# Altium PCB L298N电机驱动.PcbDoc
Units mm, origin at the board's own origin, x right, y up, seen from the top; angles counter-clockwise.
Board outline 152.4 x 101.6 mm, 2 copper layers (Top Layer, Bottom Layer); 26 components, 30 nets, 94 pads, 2 vias.
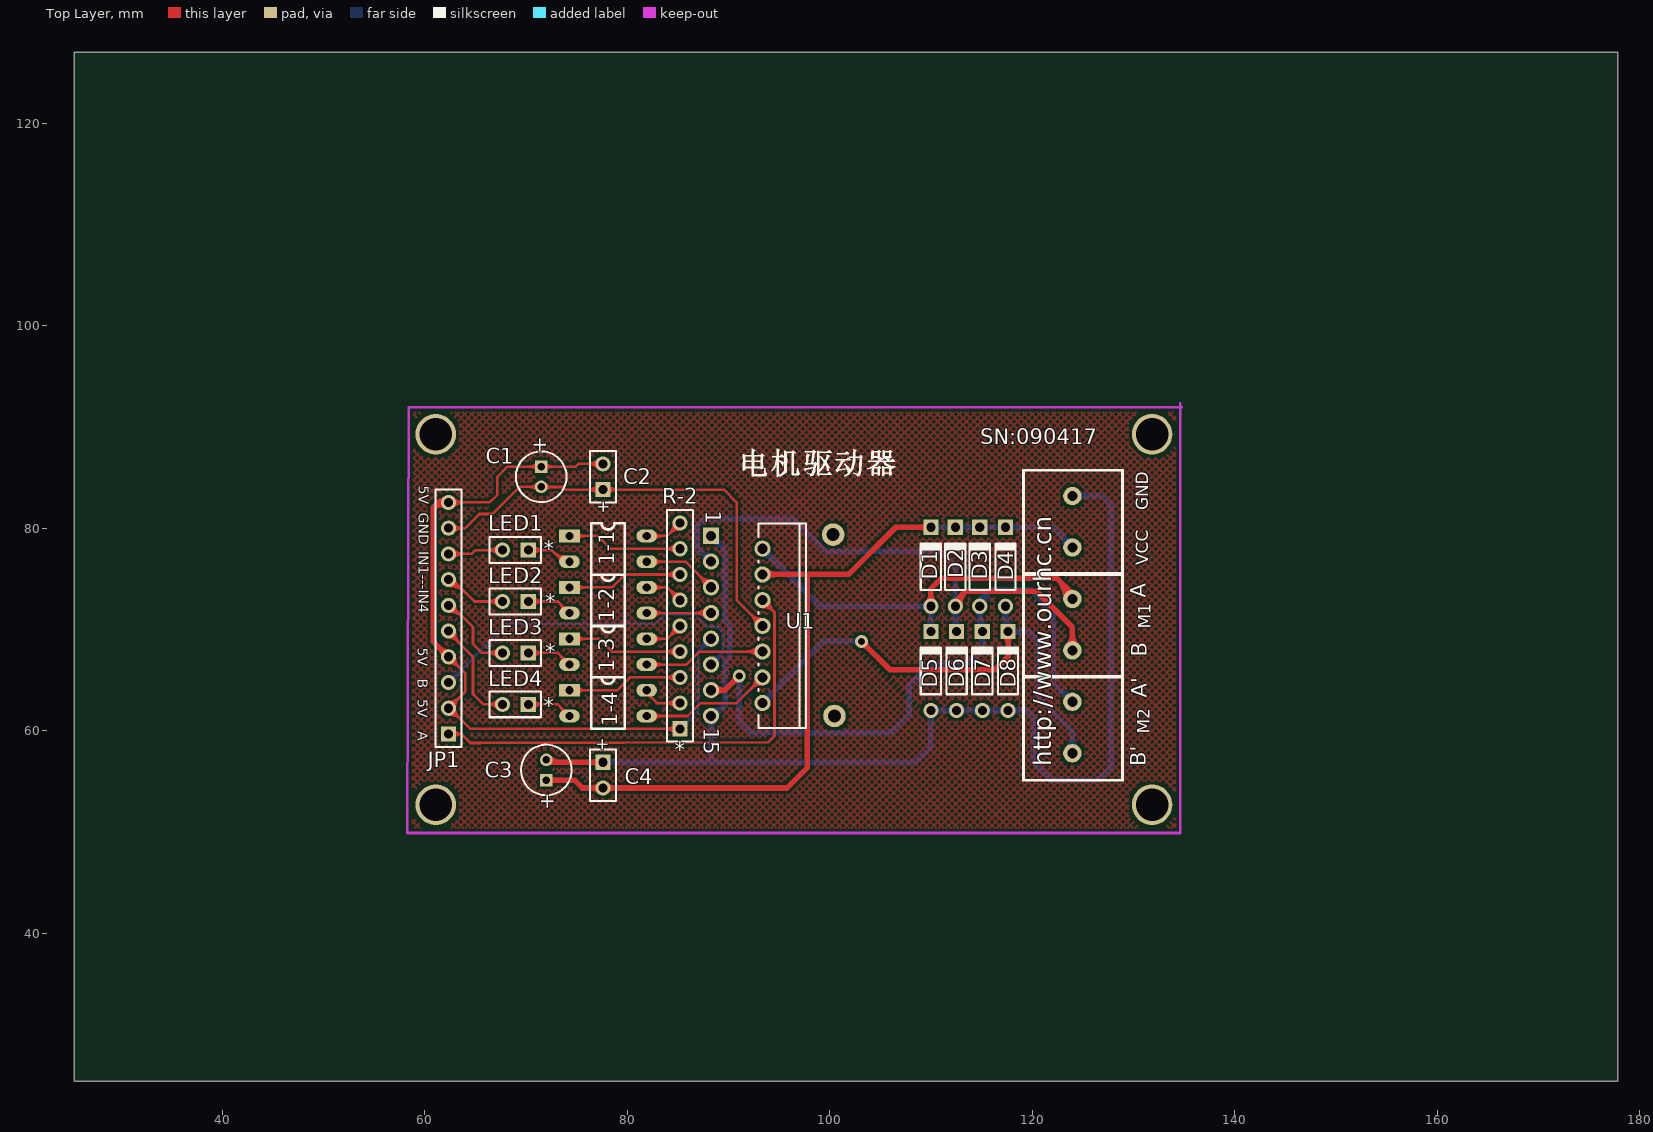
[diagram p0: Top Layer view]
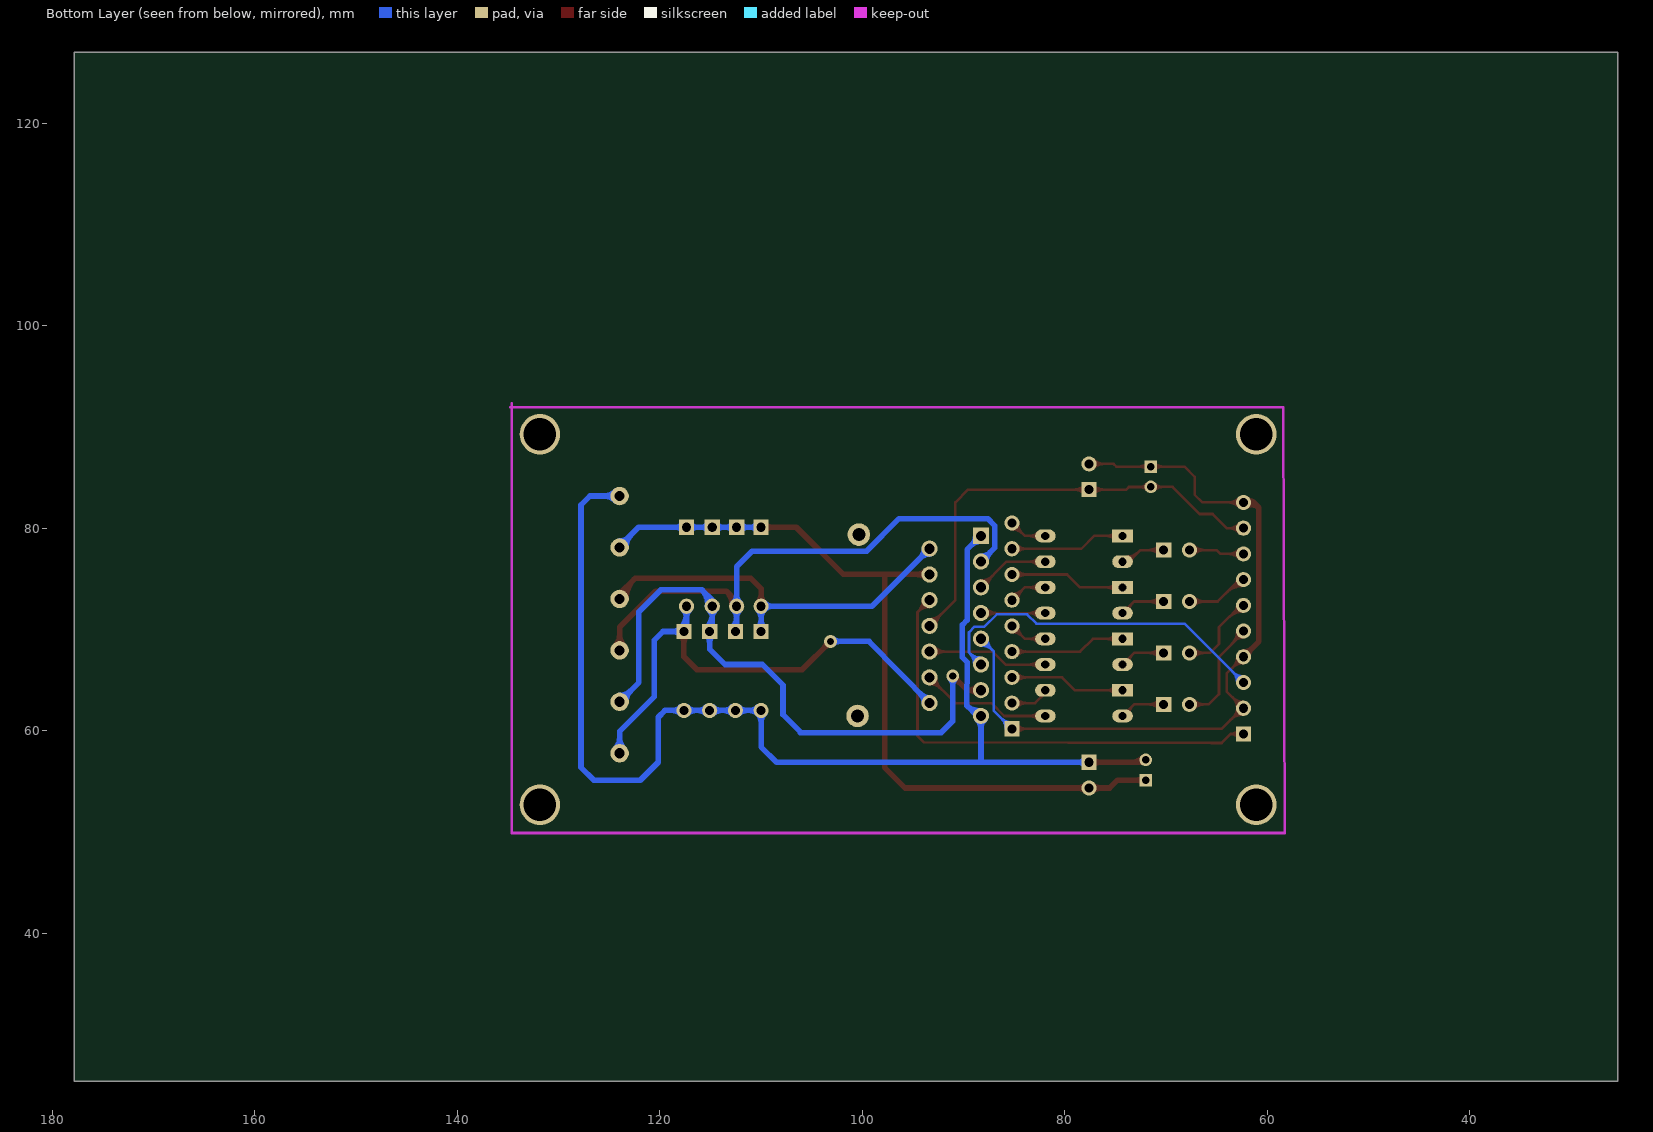
[diagram p1: Bottom Layer view, seen from below]

## Layer stack, top to bottom
Top Layer: signal copper 0.0356
Dielectric: dielectric 0.32, FR-4, Dk 4.8
Bottom Layer: signal copper 0.0356

## Board outline
25.4,25.4 177.8,25.4 177.8,127 25.4,127

## Design rules (kind name [scope] priority, off if disabled: settings)
Clearance [All] p1: gap=0.254
ComponentClearance [All] p1: gap=0.254 collisioncheckmode=3 verticalgap=0.254
PolygonConnect [All] p1: connectstyle=Relief reliefconductorwidth=0.254 reliefentries=4 polygonreliefangle="90 Angle"
RoutingVias [All] p1: holewidth=0.711 width=1.27 viastyle="Through Hole" minholewidth=0.711 minwidth=1.27 maxholewidth=0.711 maxwidth=1.27
SolderMaskExpansion [All] p1: expansion=0.102
TestPointUsage [All] p1: valid=0 allowmultiple=FALSE
Testpoint [All] p1: side=15 testpointundercomponent=TRUE minsize=1.016 maxsize=2.54 preferedsize=1.524 minholesize=0 maxholesize=1.016 preferedholesize=0.813 testpointgrid=0.025 style=1023 order=0-112345678
Width Width_2 [(InNet('NetD2_1') OR InNet('NetD3_1') OR InNet('+5V') OR InNet('+5V'))] p1: maxlimit=0.554 minlimit=0.554 preferedwidth=0.554
Width Width_1 [(InNet('+12V') OR InNet('GND-12') OR InNet('NetD4_1') OR InNet('NetD1_1'))] p2: maxlimit=0.554 minlimit=0.554 preferedwidth=0.554
Width [All] p3: maxlimit=0.254 minlimit=0.254 preferedwidth=0.254
17 further rules are at their usual default settings.

## Components (designator, comment, footprint, x,y, rotation, side; value= is the part's Value field where it differs from the comment)
1-1 "" DIP4 74.295,79.248 r0 top (schematic designator TLP521-1)
1-2 "" DIP4 74.295,74.168 r0 top (schematic designator TLP521-2)
1-3 "" DIP4 74.295,69.088 r0 top (schematic designator TLP521-3)
1-4 "" DIP4 74.295,64.008 r0 top (schematic designator TLP521-4)
C1 "" CAPPR2-5x6.8 71.501,85.09 r270 top
C2 "104" BAT-2 77.597,85.09 r90 top
C3 "" CAPPR2-5x6.8 72.009,56.134 r90 top
C4 "104" BAT-2 77.597,55.626 r270 top
D1 "1N4007" DIO7.8-4.6x2 109.982,76.2 r90 top
D2 "1N4007" DIO7.8-4.6x2 112.395,76.2 r90 top
D3 "1N4007" DIO7.8-4.6x2 114.808,76.2 r90 top
D4 "1N4007" DIO7.8-4.6x2 117.348,76.2 r90 top
D5 "1N4007" DIO7.8-4.6x2 109.982,65.913 r90 top
D6 "1N4007" DIO7.8-4.6x2 112.522,65.913 r90 top
D7 "1N4007" DIO7.8-4.6x2 115.062,65.913 r90 top
D8 "1N4007" DIO7.8-4.6x2 117.602,65.913 r90 top
JP1 "Header 10" HDR1X10 62.357,59.69 r90 top
LED1 "" HDR1X2 70.231,77.851 r180 top
LED2 "" HDR1X2 70.231,72.771 r180 top
LED3 "" HDR1X2 70.231,67.691 r180 top
LED4 "" HDR1X2 70.231,62.611 r180 top
M1 "" JK128 125.095,72.517 r0 top
M2 "" JK128 125.095,62.357 r0 top
R-2 "" HDR1X9 85.217,80.518 r270 top
U1 "L298N" DFM-T15/X1.6V 90.805,70.358 r270 top
VCC "" JK128 125.095,82.677 r0 top (schematic designator "Power 12V")

## Footprints (in the part's own frame and the unit in brackets; to place one, negate y for a bottom-side part, rotate by r counter-clockwise, add the part's x,y. Pads: shape width x height; smd on the part's side, far side on the other; paste and mask are expansions set on the pad)
BAT-2 [mm] "Multicell Battery; 2 Leads"
  rect 1.5x1.5 hole 0.9: 1(-1.27,0)
  round 1.5 hole 0.9: 2(1.27,0)
  silkscreen extent -2.54,-1.27 2.54,1.27
CAPPR2-5x6.8 [mm]
  rect 1.25x1.25 hole 0.75: 1(-1,0)
  round 1.25 hole 0.75: 2(1,0)
  silkscreen extent -2.5,-2.5 2.5,2.5
DFM-T15/X1.6V [mm]
  rect 1.6x1.6 hole 1: 1(-8.895,-2.531)
  round 1.6 hole 1: 2(-7.625,2.549) 3(-6.355,-2.531) 4(-5.085,2.549) 5(-3.815,-2.531) 6(-2.545,2.549) 7(-1.275,-2.531) 8(-0.005,2.549) 9(1.265,-2.531) 10(2.535,2.549) 11(3.805,-2.531) 12(5.075,2.549) 13(6.345,-2.531) 14(7.615,2.549) 15(8.885,-2.531)
  silkscreen extent -10.1,2.15 10.1,6.85
DIO7.8-4.6x2 [mm] "Diode, Axial; Body 4.6 x 1.9 mm (LxDia. max), Lead Dia. 0.53 mm (max)"
  round 1.5 hole 0.9: 1(-3.9,0)
  rect 1.5x1.5 hole 0.9: 2(3.9,0)
  silkscreen extent -2.3,-1 2.4,1
DIP4 [mil]
  rect 80x50 hole 32: 1(0.03,-0.24)
  oval 80x50 hole 32: 2(0.03,-100.24) 3(300.03,-100.24) 4(300.03,-0.24)
  silkscreen extent 85,-150 215,50
HDR1X2 [mm]
  rect 1.5x1.5 hole 0.9: 1(0,0)
  round 1.5 hole 0.9: 2(2.54,0)
  silkscreen extent -1.27,-1.27 3.81,1.27
HDR1X9 [mm] "Connector; Header; 9 Position"
  round 1.5 hole 0.9: 1(0,0) 2(2.54,0) 3(5.08,0) 4(7.62,0) 5(10.16,0) 6(12.7,0) 7(15.24,0) 8(17.78,0)
  rect 1.5x1.5 hole 0.9: 9(20.32,0)
  silkscreen extent -1.27,-1.27 21.59,1.27
HDR1X10 [mm] "Connector; Header; 10 Position"
  rect 1.5x1.5 hole 0.9: 1(0,0)
  round 1.5 hole 0.9: 2(2.54,0) 3(5.08,0) 4(7.62,0) 5(10.16,0) 6(12.7,0) 7(15.24,0) 8(17.78,0) 9(20.32,0) 10(22.86,0)
  silkscreen extent -1.27,-1.27 24.13,1.27
JK128 [mil]
  round 71.81 hole 39.37: 1(-45,20) 2(-45,-180)
  silkscreen extent -235,-285 150,120

## Part data
1-1 1-2 1-3 1-4: library part TLP521-1
C1 C3: library part "Cap Pol3", "Polarized Capacitor (Surface Mount)"
C2 C4: library part Cap, "Capacitor"
D1 D2 D3 D4 D5 D6 D7 D8: library part "Diode 1N4007", "1 Amp General Purpose Rectifier"
JP1: "Header, 10-Pin"
LED1 LED2 LED3 LED4: library part LED3, "Typical BLUE SiC LED"
M1 M2 VCC: library part MHDR1X2, "Header, 2-Pin"
R-2: library part "Header 9", "Header, 9-Pin"
U1: "Dual Full Bridge Driver"

## Free pads (board coordinates)
  round 4 hole 3.22: 0(61.087,52.705) 0(61.087,89.281) 0(131.826,52.705) 0(131.826,89.281)
  round 2.224 hole 1.262: 0(100.33,79.375) 0(100.457,61.468)

## Via types
v1: diameter 1.27, hole 0.711, Top Layer to Bottom Layer, 2 vias

## Nets (pads, with @x,y where several pads share a name; then routed paths per layer and width w, separated by ;. In a path a pad name is that pad's centre, name@x,y a point inside that pad or via, vN(x,y) a via of type N, cw(c..) or ccw(c..) an arc to the next point about the centre after c; other vN are vias at no path point)
+5V: C1.1 C2.2 JP1.2 JP1.4 JP1.10 R-2.9 U1.9 | length 157.5
  Top Layer w0.254: JP1.4 64.008,65.659 64.008,63.881 JP1.2 62.484,62.23 64.516,60.198 R-2.9 ; JP1.10 66.421,82.55 67.183,83.312 67.183,85.09 68.183,86.09 C1.1 74.914,86.09 75.184,86.36 C2.2 ; JP1.2@62.98,62.23 cw(c64.484,62.23) 63.421,63.294 ; JP1.2@62.98,62.23 ccw(c64.177,62.23) 63.331,61.383 cw(c64.177,62.23) JP1.2@62.98,62.23 ; JP1.2@62.98,62.23 cw(c64.484,62.23) 63.421,63.294 ; 62.987,62.86 cw(c62.357,63.49) 62.357,62.599 ccw(c62.357,63.49) 62.987,62.86 ; 62.987,62.86 ccw(c63.617,62.23) 62.726,62.23 cw(c63.617,62.23) 62.987,62.86 ; 62.987,66.68 cw(c63.617,67.31) 62.726,67.31 ccw(c63.617,67.31) 62.987,66.68 ; 62.987,66.68 ccw(c62.357,66.05) 62.357,66.941 cw(c62.357,66.05) 62.987,66.68 ; 63.248,82.55 cw(c63.248,83.441) 62.618,82.811 ccw(c63.248,83.441) 63.248,82.55 ; 63.248,82.55 ccw(c63.248,81.659) 62.618,82.289 cw(c63.248,81.659) 63.248,82.55 ; 63.421,63.294 cw(c62.357,64.357) 62.357,62.853 ccw(c62.357,64.357) 63.421,63.294 ; 63.421,66.246 cw(c64.484,67.31) 62.98,67.31 ccw(c64.484,67.31) 63.421,66.246 ; 63.421,66.246 ccw(c62.357,65.183) 62.357,66.687 cw(c62.357,65.183) 63.421,66.246 ; 63.861,82.55 cw(c63.861,84.054) 62.798,82.991 ccw(c63.861,84.054) 63.861,82.55 ; 63.861,82.55 ccw(c63.861,81.046) 62.798,82.109 cw(c63.861,81.046) 63.861,82.55 ; 70.299,86.09 cw(c70.299,84.888) 71.149,85.738 ccw(c70.299,84.888) 70.299,86.09 ; 70.299,86.09 ccw(c70.299,87.292) 71.149,86.442 cw(c70.299,87.292) 70.299,86.09 ; 72.703,86.09 cw(c72.703,87.292) 71.853,86.442 ccw(c72.703,87.292) 72.703,86.09 ; 72.703,86.09 ccw(c72.703,84.888) 71.853,85.738 cw(c72.703,84.888) 72.703,86.09 ; 76.093,86.36 cw(c76.093,84.856) 77.156,85.919 ccw(c76.093,84.856) 76.093,86.36 ; 76.093,86.36 ccw(c76.093,87.864) 77.156,86.801 cw(c76.093,87.864) 76.093,86.36 ; 76.706,86.36 cw(c76.706,85.469) 77.336,86.099 ccw(c76.706,85.469) 76.706,86.36 ; 76.706,86.36 ccw(c76.706,87.251) 77.336,86.621 cw(c76.706,87.251) 76.706,86.36 ; 83.713,60.198 cw(c83.713,58.694) 84.776,59.757 ccw(c83.713,58.694) 83.713,60.198 ; 83.713,60.198 ccw(c83.713,61.702) 84.776,60.639 cw(c83.713,61.702) 83.713,60.198 ; 84.326,60.198 cw(c84.326,59.307) 84.956,59.937 ccw(c84.326,59.307) 84.326,60.198 ; 84.326,60.198 ccw(c84.326,61.089) 84.956,60.459 cw(c84.326,61.089) 84.326,60.198 ; JP1.2@62.357,61.607 cw(c62.357,59.796) 63.637,61.077 ccw(c62.357,59.796) JP1.2@62.357,61.607 ; JP1.2@62.357,61.861 cw(c62.357,60.664) 63.204,61.51 ccw(c62.357,60.664) JP1.2@62.357,61.861
  Top Layer w0.554: JP1.4 60.833,68.834 60.833,82.042 ; JP1.10 61.341,82.55 ; 60.833,82.042 cw(c61.532,81.343) 62.09,82.159 ccw(c61.532,81.343) 60.833,82.042 ; 60.833,82.042 61.341,82.55 ; 61.341,82.55 cw(c61.341,81.695) 61.995,82.246 ccw(c61.341,81.695) 61.341,82.55 ; 61.341,82.55 ccw(c61.341,83.405) 61.995,82.854 cw(c61.341,83.405) 61.341,82.55 ; 61.55,68.117 cw(c60.742,67.31) 61.884,67.31 ccw(c60.742,67.31) 61.55,68.117 ; 61.55,68.117 ccw(c62.357,68.925) 62.357,67.783 cw(c62.357,68.925) 61.55,68.117 ; 61.034,82.243 cw(c62.054,81.223) 62.375,82.629 ccw(c62.054,81.223) 61.034,82.243 ; 61.305,82.514 cw(c61.916,81.904) 62.403,82.617 ccw(c61.916,81.904) 61.305,82.514
  Bottom Layer w0.254: R-2.9 86.995,61.976 86.995,67.814 U1.9 ; R-2.9@85.847,60.828 cw(c85.217,61.458) 85.217,60.567 ccw(c85.217,61.458) R-2.9@85.847,60.828 ; R-2.9@85.847,60.828 ccw(c86.477,60.198) 85.586,60.198 cw(c86.477,60.198) R-2.9@85.847,60.828 ; 86.281,61.262 cw(c85.217,62.325) 85.217,60.821 ccw(c85.217,62.325) 86.281,61.262 ; 86.281,61.262 ccw(c87.344,60.198) 85.84,60.198 cw(c87.344,60.198) 86.281,61.262 ; 87.125,67.944 cw(c88.274,66.795) 88.274,68.42 ccw(c88.274,66.795) 87.125,67.944 ; 87.125,67.944 ccw(c85.976,69.093) 87.601,69.093 cw(c85.976,69.093) 87.125,67.944 ; 87.559,68.377 cw(c88.274,67.662) 88.274,68.674 ccw(c88.274,67.662) 87.559,68.377 ; 87.559,68.377 ccw(c86.843,69.093) 87.855,69.093 cw(c86.843,69.093) 87.559,68.377
+12V: C3.1 C4.2 D1.2 D2.2 D3.2 D4.2 U1.4 VCC.2 | length 115.3
  Top Layer w0.554: C3.1 74.787,55.134 75.565,54.356 C4.2 95.758,54.356 97.79,56.388 97.79,75.443 ; U1.4 97.79,75.443 ; D1.2 106.516,80.1 101.859,75.443 97.79,75.443 ; 72.849,55.134 cw(c72.849,55.974) 72.255,55.38 ccw(c72.849,55.974) 72.849,55.134 ; 72.849,55.134 ccw(c72.849,54.294) 72.255,54.888 cw(c72.849,54.294) 72.849,55.134 ; 76.455,54.356 cw(c76.455,53.214) 77.263,54.022 ccw(c76.455,53.214) 76.455,54.356 ; 76.455,54.356 ccw(c76.455,55.498) 77.263,54.69 cw(c76.455,55.498) 76.455,54.356 ; 78.739,54.356 cw(c78.739,55.498) 77.931,54.69 ccw(c78.739,55.498) 78.739,54.356 ; 78.739,54.356 ccw(c78.739,53.214) 77.931,54.022 cw(c78.739,53.214) 78.739,54.356 ; 94.617,75.443 cw(c94.617,76.705) 93.724,75.812 ccw(c94.617,76.705) 94.617,75.443 ; 94.617,75.443 ccw(c94.617,74.18) 93.724,75.073 cw(c94.617,74.18) 94.617,75.443 ; 108.84,80.1 cw(c108.84,78.958) D1.2@109.648,79.766 ; 108.84,80.1 ccw(c108.84,81.242) D1.2@109.648,80.434 ; 108.84,80.1 ccw(c108.84,81.242) D1.2@109.648,80.434 ; 108.84,80.1 cw(c108.84,78.958) D1.2@109.648,79.766 ; 108.84,80.1 ccw(c108.84,81.242) D1.2@109.648,80.434 ; 108.84,80.1 cw(c108.84,78.958) D1.2@109.648,79.766 ; 108.84,80.1 ccw(c108.84,81.242) D1.2@109.648,80.434 ; 108.84,80.1 cw(c108.84,78.958) D1.2@109.648,79.766
  Bottom Layer w0.554: D1.2 122.084,80.1 123.952,78.232 VCC.2 ; D1.2@110.316,79.766 cw(c111.124,78.958) 111.124,80.1 cw(c111.124,81.242) D1.2@110.316,80.434 ; D2.2@112.061,79.766 ccw(c111.253,78.958) 111.253,80.1 ccw(c111.253,81.242) D2.2@112.061,80.434 ; D2.2@112.729,79.766 cw(c113.537,78.958) 113.537,80.1 cw(c113.537,81.242) D2.2@112.729,80.434 ; D3.2@114.474,79.766 ccw(c113.666,78.958) 113.666,80.1 ccw(c113.666,81.242) D3.2@114.474,80.434 ; D3.2@115.142,79.766 cw(c115.95,78.958) 115.95,80.1 cw(c115.95,81.242) D3.2@115.142,80.434 ; D4.2@117.014,79.766 ccw(c116.206,78.958) 116.206,80.1 ccw(c116.206,81.242) D4.2@117.014,80.434 ; D4.2@117.682,79.766 cw(c118.49,78.958) 118.49,80.1 cw(c118.49,81.242) D4.2@117.682,80.434 ; 122.778,79.406 cw(c121.477,78.105) VCC.2@123.317,78.105 ; 123.085,79.099 ccw(c123.952,79.966) VCC.2@123.952,78.74
GND: C1.2 C2.1 JP1.9 U1.8 | length 83.4
  Top Layer w0.254: JP1.9 64.008,80.01 65.405,81.407 66.675,81.407 69.358,84.09 C1.2 71.517,84.074 73.66,84.074 73.914,83.82 C2.1 89.535,83.82 90.805,82.55 90.805,72.912 U1.8 ; 63.248,80.01 cw(c63.248,80.901) 62.618,80.271 ccw(c63.248,80.901) 63.248,80.01 ; 63.248,80.01 ccw(c63.248,79.119) 62.618,79.749 cw(c63.248,79.119) 63.248,80.01 ; 63.861,80.01 cw(c63.861,81.514) 62.798,80.451 ccw(c63.861,81.514) 63.861,80.01 ; 63.861,80.01 ccw(c63.861,78.506) 62.798,79.569 cw(c63.861,78.506) 63.861,80.01 ; 70.299,84.09 cw(c70.299,82.888) 71.149,83.738 ccw(c70.299,82.888) 70.299,84.09 ; 70.299,84.09 ccw(c70.299,85.292) 71.149,84.442 cw(c70.299,85.292) 70.299,84.09 ; 76.093,83.82 cw(c76.093,82.316) 77.156,83.379 ccw(c76.093,82.316) 76.093,83.82 ; 76.093,83.82 ccw(c76.093,85.324) 77.156,84.261 cw(c76.093,85.324) 76.093,83.82 ; 76.706,83.82 cw(c76.706,82.929) 77.336,83.559 ccw(c76.706,82.929) 76.706,83.82 ; 76.706,83.82 ccw(c76.706,84.711) 77.336,84.081 cw(c76.706,84.711) 76.706,83.82 ; 78.488,83.82 cw(c78.488,84.711) 77.858,84.081 ccw(c78.488,84.711) 78.488,83.82 ; 78.488,83.82 ccw(c78.488,82.929) 77.858,83.559 cw(c78.488,82.929) 78.488,83.82 ; 79.101,83.82 cw(c79.101,85.324) 78.038,84.261 ccw(c79.101,85.324) 79.101,83.82 ; 79.101,83.82 ccw(c79.101,82.316) 78.038,83.379 cw(c79.101,82.316) 79.101,83.82 ; 92.205,71.512 cw(c91.056,70.363) 92.681,70.363 ccw(c91.056,70.363) 92.205,71.512 ; 92.205,71.512 ccw(c93.354,72.66) 93.354,71.036 cw(c93.354,72.66) 92.205,71.512 ; 92.639,71.078 cw(c91.923,70.363) 92.935,70.363 ccw(c91.923,70.363) 92.639,71.078 ; 92.639,71.078 ccw(c93.354,71.793) 93.354,70.782 cw(c93.354,71.793) 92.639,71.078 ; C1.2@71.674,84.263 ccw(c72.129,84.718) 72.129,84.074 cw(c72.129,84.718) C1.2@71.674,84.263 ; C1.2@71.853,83.738 cw(c72.665,82.926) 72.665,84.074 ccw(c72.665,82.926) C1.2@71.853,83.738 ; C1.2@71.853,84.442 ccw(c72.742,85.331) 72.742,84.074 cw(c72.742,85.331) C1.2@71.853,84.442
GND-12: C3.2 C4.1 D5.1 D6.1 D7.1 D8.1 U1.1 U1.15 VCC.1 | length 157.9
  Top Layer w0.554: C3.2@71.882,57.277 71.882,57.261 C3.2 72.247,56.896 C4.1 ; 76.455,56.896 cw(c76.455,55.754) 77.263,56.562 ccw(c76.455,55.754) 76.455,56.896 ; 76.455,56.896 ccw(c76.455,58.038) 77.263,57.23 cw(c76.455,58.038) 76.455,56.896 ; C3.2@72.255,57.38 ccw(c73.424,58.549) 73.424,56.896 cw(c73.424,58.549) C3.2@72.255,57.38
  Bottom Layer w0.554: C4.1 108.458,56.896 109.982,58.42 D5.1 119.47,62.013 120.142,61.341 120.142,56.896 121.92,55.118 126.492,55.118 127.762,56.388 127.762,82.296 126.873,83.185 VCC.1 ; 88.138,56.896 88.274,57.032 U1.15 88.651,61.473 89.662,62.484 ; U1.1 89.639,77.888 89.639,70.932 90.113,70.458 90.113,67.254 89.639,66.78 89.662,62.484 ; D5.1@109.648,61.679 cw(c108.84,60.871) 109.982,60.871 cw(c111.124,60.871) 110.316,61.679 cw(c111.124,60.871) 111.124,62.013 cw(c111.124,63.155) D5.1@110.316,62.347 ; D6.1@112.188,61.679 ccw(c111.38,60.871) 111.38,62.013 ccw(c111.38,63.155) D6.1@112.188,62.347 ; D6.1@112.856,61.679 cw(c113.664,60.871) 113.664,62.013 cw(c113.664,63.155) D6.1@112.856,62.347 ; D7.1@114.728,61.679 ccw(c113.92,60.871) 113.92,62.013 ccw(c113.92,63.155) D7.1@114.728,62.347 ; D7.1@115.396,61.679 cw(c116.204,60.871) 116.204,62.013 cw(c116.204,63.155) D7.1@115.396,62.347 ; D8.1@117.268,61.679 ccw(c116.46,60.871) 116.46,62.013 ccw(c116.46,63.155) D8.1@117.268,62.347 ; D8.1@117.936,61.679 cw(c118.744,60.871) 118.744,62.013 cw(c118.744,63.155) D8.1@117.936,62.347 ; VCC.1@124.401,82.736 cw(c125.485,81.652) 125.485,83.185 cw(c125.485,84.718) VCC.1@124.401,83.634 ; 78.739,56.896 cw(c78.739,58.038) 77.931,57.23 ccw(c78.739,58.038) 78.739,56.896 ; 78.739,56.896 ccw(c78.739,55.754) 77.931,56.562 cw(c78.739,55.754) 78.739,56.896 ; 88.274,60.21 cw(c89.537,60.21) 88.644,61.103 ccw(c89.537,60.21) 88.274,60.21 ; 88.274,60.21 ccw(c87.011,60.21) 87.904,61.103 cw(c87.011,60.21) 88.274,60.21 ; 89.167,78.36 cw(c90.06,79.253) 88.797,79.253 ccw(c90.06,79.253) 89.167,78.36 ; 89.167,78.36 ccw(c88.274,77.467) 88.274,78.73 cw(c88.274,77.467) 89.167,78.36 ; 89.662,62.484 cw(c88.463,63.682) 88.319,61.994 ccw(c88.463,63.682) 89.662,62.484
NetD1_1: D1.1 D5.2 M1.1 U1.2 | length 53.2
  Top Layer w0.554: D1.1@109.648,72.634 ccw(c108.84,73.442) 109.982,73.442 ccw(c111.124,73.442) D1.1@110.316,72.634 ; D1.1 109.982,74.041 110.998,75.057 122.428,75.057 123.952,73.533 M1.1 ; 122.509,74.976 cw(c120.558,73.025) M1.1@123.317,73.025 ; 123.455,74.03 cw(c122.449,73.025) M1.1@123.871,73.025
  Bottom Layer w0.554: U1.2 99.037,72.3 D1.1 D5.2 ; D5.2@109.648,70.147 ccw(c108.84,70.955) 109.982,70.955 ccw(c111.124,70.955) D5.2@110.316,70.147 ; D1.1@109.648,72.634 cw(c108.84,73.442) 108.84,72.3 cw(c108.84,71.158) 109.648,71.966 cw(c108.84,71.158) 109.982,71.158 cw(c111.124,71.158) D1.1@110.316,71.966 ; 94.247,77.09 cw(c95.14,77.983) 93.877,77.983 ccw(c95.14,77.983) 94.247,77.09 ; 94.247,77.09 ccw(c93.354,76.197) 93.354,77.46 cw(c93.354,76.197) 94.247,77.09
NetD2_1: D2.1 D6.2 M1.2 U1.3 | length 67.8
  Top Layer w0.554: D2.1 112.395,72.771 113.411,73.787 ; D2.1@112.867,72.333 cw(c114.735,72.463) 113.411,73.787 ; M1.2@123.503,68.394 ccw(c122.419,69.478) 123.952,69.478 ccw(c125.485,69.478) M1.2@124.401,68.394 ; M1.2 123.952,70.231 120.396,73.787 113.411,73.787
  Bottom Layer w0.554: U1.3 86.919,78.068 86.919,80.264 87.605,80.95 96.35,80.95 99.568,77.732 110.863,77.732 112.395,76.2 112.395,69.977 112.522,69.85 D6.2 ; D2.1@112.061,71.966 cw(c111.253,71.158) 112.395,71.158 cw(c113.537,71.158) D2.1@112.729,71.966 ; D2.1@112.061,72.634 ccw(c111.253,73.442) 112.395,73.442 ccw(c113.537,73.442) D2.1@112.729,72.634 ; D6.2@112.188,70.147 ccw(c111.687,70.648) 112.395,70.648 ; 112.395,71.262 ccw(c113.971,71.262) D6.2@112.856,70.147 ; 87.381,77.605 cw(c86.488,76.713) 87.751,76.713 ccw(c86.488,76.713) 87.381,77.605 ; 87.381,77.605 ccw(c88.274,78.498) 88.274,77.236 cw(c88.274,78.498) 87.381,77.605
NetD3_1: D3.1 D7.2 M2.1 U1.13 | length 80.2
  Top Layer w0.554: U1.13 89.667,64.013 v1(91.059,65.405) ; 89.537,64.013 cw(c89.537,65.275) 88.644,64.382 ccw(c89.537,65.275) 89.537,64.013 ; 89.537,64.013 ccw(c89.537,62.75) 88.644,63.643 cw(c89.537,62.75) 89.537,64.013 ; 90.448,64.794 cw(c91.059,64.183) 91.059,65.047 ccw(c91.059,64.183) 90.448,64.794 ; 90.448,64.794 ccw(c89.837,65.405) 90.701,65.405 cw(c89.837,65.405) 90.448,64.794
  Bottom Layer w0.554: v1(91.059,65.405) 91.059,60.96 92.194,59.825 106.104,59.825 106.104,59.876 107.823,61.595 107.823,64.516 109.855,66.548 113.538,66.548 115.062,68.072 D7.2 114.808,70.067 114.808,72.898 115.824,73.914 ; D3.1@114.474,71.966 cw(c113.666,71.158) 114.808,71.158 cw(c115.95,71.158) D3.1@115.142,71.966 ; D7.2@114.728,69.479 cw(c113.92,68.671) 115.062,68.671 cw(c116.204,68.671) D7.2@115.396,69.479 ; D3.1@114.728,72.291 cw(c115.71,72.402) 115.011,73.101 ; D3.1@114.808,71.568 ccw(c116.817,71.568) D7.2@115.396,70.147 ; D3.1@115.278,72.353 cw(c117.171,72.567) 115.824,73.914 ; M2.1@123.317,62.865 ccw(c121.784,62.865) 122.868,63.949 ccw(c123.952,65.033) M2.1@123.952,63.5 ; M2.1 122.047,64.77 122.047,71.755 119.888,73.914 115.824,73.914 ; 91.059,64.541 cw(c91.923,64.541) 91.312,65.152 ccw(c91.923,64.541) 91.059,64.541 ; 91.059,64.541 ccw(c90.195,64.541) 90.806,65.152 cw(c90.195,64.541) 91.059,64.541
NetD4_1: D4.1 D8.2 M2.2 U1.14 | length 65.5
  Top Layer w0.554: v1@103.124,68.476 cw(c103.124,67.612) 103.735,68.223 cw(c104.346,68.834) v1@103.482,68.834 ; v1(103.124,68.834) 105.918,66.04 116.332,66.04 117.602,67.31 D8.2 ; D8.2@117.268,69.479 cw(c116.46,68.671) 117.602,68.671 cw(c118.744,68.671) D8.2@117.936,69.479
  Bottom Layer w0.554: U1.14@93.348,63.266 ccw(c93.335,64.528) 94.237,63.645 ccw(c95.14,62.762) U1.14@93.877,62.748 ; U1.14 99.314,68.834 v1(103.124,68.834) ; U1.14@93.354,63.266 ccw(c93.354,64.528) 94.247,63.635 ccw(c95.14,62.743) U1.14@93.877,62.743 ; v1@102.871,68.581 ccw(c102.26,67.97) 102.26,68.834 ccw(c102.26,69.698) v1@102.871,69.087 ; D4.1@117.014,71.966 cw(c116.206,71.158) 117.348,71.158 cw(c118.49,71.158) D4.1@117.682,71.966 ; D4.1@117.348,71.568 ccw(c119.357,71.568) 117.936,70.147 ccw(c118.744,70.955) 118.744,69.813 ccw(c118.744,68.671) D8.2@117.936,69.479 ; D4.1 117.348,70.067 D8.2 119.671,69.813 120.523,68.961 120.523,63.373 123.952,59.944 M2.2 ; M2.2@123.503,58.234 ccw(c122.419,59.318) 123.952,59.318 ccw(c125.485,59.318) M2.2@124.401,58.234
NetJP1_5: JP1.5 LED4.2 | length 24.7
  Top Layer w0.254: JP1.5 62.357,69.723 64.77,67.31 64.77,63.627 65.786,62.611 LED4.2 ; 66.187,62.611 cw(c66.187,61.107) 67.25,62.17 ccw(c66.187,61.107) 66.187,62.611 ; 66.187,62.611 ccw(c66.187,64.115) 67.25,63.052 cw(c66.187,64.115) 66.187,62.611 ; 66.8,62.611 cw(c66.8,61.72) 67.43,62.35 ccw(c66.8,61.72) 66.8,62.611 ; 66.8,62.611 ccw(c66.8,63.502) 67.43,62.872 cw(c66.8,63.502) 66.8,62.611 ; JP1.5@62.357,69.227 cw(c62.357,68.03) 63.204,68.876 ccw(c62.357,68.03) JP1.5@62.357,69.227 ; JP1.5@62.726,69.85 ccw(c63.923,69.85) 63.077,69.003 cw(c63.923,69.85) JP1.5@62.726,69.85 ; JP1.5@62.98,69.85 ccw(c64.791,69.85) 63.51,68.57 cw(c64.791,69.85) JP1.5@62.98,69.85
NetJP1_6: JP1.6 LED3.2 | length 22.9
  Top Layer w0.254: JP1.6 62.611,72.39 64.77,70.231 64.77,68.58 65.659,67.691 LED3.2 ; 66.187,67.691 cw(c66.187,66.187) 67.25,67.25 ccw(c66.187,66.187) 66.187,67.691 ; 66.187,67.691 ccw(c66.187,69.195) 67.25,68.132 cw(c66.187,69.195) 66.187,67.691 ; 66.8,67.691 cw(c66.8,66.8) 67.43,67.43 ccw(c66.8,66.8) 66.8,67.691 ; 66.8,67.691 ccw(c66.8,68.582) 67.43,67.952 cw(c66.8,68.582) 66.8,67.691 ; JP1.6@62.357,71.767 cw(c62.357,69.65) 63.854,71.147 ccw(c62.357,69.65) JP1.6@62.357,71.767 ; JP1.6@62.357,72.021 cw(c62.357,70.517) 63.421,71.58 ccw(c62.357,70.517) JP1.6@62.357,72.021 ; JP1.6@62.98,72.39 ccw(c63.871,72.39) 63.241,71.76 cw(c63.871,72.39) JP1.6@62.98,72.39
NetJP1_7: JP1.7 LED2.2 | length 23.2
  Top Layer w0.254: JP1.7 62.738,74.93 64.897,72.771 LED2.2 ; 66.187,72.771 cw(c66.187,71.267) 67.25,72.33 ccw(c66.187,71.267) 66.187,72.771 ; 66.187,72.771 ccw(c66.187,74.275) 67.25,73.212 cw(c66.187,74.275) 66.187,72.771 ; 66.8,72.771 cw(c66.8,71.88) 67.43,72.51 ccw(c66.8,71.88) 66.8,72.771 ; 66.8,72.771 ccw(c66.8,73.662) 67.43,73.032 cw(c66.8,73.662) 66.8,72.771 ; JP1.7@62.357,74.307 cw(c62.357,71.883) 64.071,73.597 ccw(c62.357,71.883) JP1.7@62.357,74.307 ; JP1.7@62.357,74.561 cw(c62.357,72.75) 63.637,74.031 ccw(c62.357,72.75) JP1.7@62.357,74.561 ; JP1.7@62.357,74.815 cw(c62.357,73.618) 63.204,74.464 ccw(c62.357,73.618) JP1.7@62.357,74.815 ; JP1.7@62.98,74.93 ccw(c63.564,74.93) 63.151,74.517 cw(c63.564,74.93) JP1.7@62.98,74.93
NetJP1_8: JP1.8 LED1.2 | length 20.5
  Top Layer w0.254: JP1.8 64.643,77.47 65.024,77.851 LED1.2 ; 63.248,77.47 cw(c63.248,78.361) 62.618,77.731 ccw(c63.248,78.361) 63.248,77.47 ; 63.248,77.47 ccw(c63.248,76.579) 62.618,77.209 cw(c63.248,76.579) 63.248,77.47 ; 63.861,77.47 cw(c63.861,78.974) 62.798,77.911 ccw(c63.861,78.974) 63.861,77.47 ; 63.861,77.47 ccw(c63.861,75.966) 62.798,77.029 cw(c63.861,75.966) 63.861,77.47 ; 66.187,77.851 cw(c66.187,76.347) 67.25,77.41 ccw(c66.187,76.347) 66.187,77.851 ; 66.187,77.851 ccw(c66.187,79.355) 67.25,78.292 cw(c66.187,79.355) 66.187,77.851 ; 66.8,77.851 cw(c66.8,76.96) 67.43,77.59 ccw(c66.8,76.96) 66.8,77.851 ; 66.8,77.851 ccw(c66.8,78.742) 67.43,78.112 cw(c66.8,78.742) 66.8,77.851
NetLED1_1: 1-1.2 LED1.1 | length 17.7
  Top Layer w0.254: LED1.1 72.517,77.851 73.666,76.702 1-1.2 ; 71.122,77.851 cw(c71.122,78.742) 70.492,78.112 ccw(c71.122,78.742) 71.122,77.851 ; 71.122,77.851 ccw(c71.122,76.96) 70.492,77.59 cw(c71.122,76.96) 71.122,77.851 ; 71.735,77.851 cw(c71.735,79.355) 70.672,78.292 ccw(c71.735,79.355) 71.735,77.851 ; 71.735,77.851 ccw(c71.735,76.347) 70.672,77.41 cw(c71.735,76.347) 71.735,77.851 ; 72.641,77.727 ccw(c73.889,78.975) 73.909,77.21 cw(c73.889,78.975) 72.641,77.727 ; 73.068,77.3 ccw(c73.899,78.13) 73.912,76.956 cw(c73.899,78.13) 73.068,77.3 ; 73.223,77.145 cw(c72.781,76.702) 73.407,76.702 ccw(c72.781,76.702) 73.223,77.145
NetLED2_1: 1-2.2 LED2.1 | length 14.6
  Top Layer w0.254: LED2.1 73.147,72.771 1-2.2 ; 71.122,72.771 cw(c71.122,73.662) 70.492,73.032 ccw(c71.122,73.662) 71.122,72.771 ; 71.122,72.771 ccw(c71.122,71.88) 70.492,72.51 cw(c71.122,71.88) 71.122,72.771 ; 71.735,72.771 cw(c71.735,74.275) 70.672,73.212 ccw(c71.735,74.275) 71.735,72.771 ; 71.735,72.771 ccw(c71.735,71.267) 70.672,72.33 cw(c71.735,71.267) 71.735,72.771 ; 73.332,72.586 cw(c72.518,71.772) 73.662,71.649 ccw(c72.518,71.772) 73.332,72.586 ; 73.698,72.22 ccw(c73.915,72.436) 73.915,72.13 cw(c73.915,72.436) 73.698,72.22
NetLED3_1: 1-3.2 LED3.1 | length 14.6
  Top Layer w0.254: LED3.1 73.147,67.691 1-3.2 ; 71.122,67.691 cw(c71.122,68.582) 70.492,67.952 ccw(c71.122,68.582) 71.122,67.691 ; 71.122,67.691 ccw(c71.122,66.8) 70.492,67.43 cw(c71.122,66.8) 71.122,67.691 ; 71.735,67.691 cw(c71.735,69.195) 70.672,68.132 ccw(c71.735,69.195) 71.735,67.691 ; 71.735,67.691 ccw(c71.735,66.187) 70.672,67.25 cw(c71.735,66.187) 71.735,67.691 ; 73.332,67.506 cw(c72.518,66.692) 73.662,66.569 ccw(c72.518,66.692) 73.332,67.506 ; 73.698,67.14 ccw(c73.915,67.356) 73.915,67.05 cw(c73.915,67.356) 73.698,67.14
NetLED4_1: 1-4.2 LED4.1 | length 14.6
  Top Layer w0.254: LED4.1 73.147,62.611 1-4.2 ; 71.122,62.611 cw(c71.122,63.502) 70.492,62.872 ccw(c71.122,63.502) 71.122,62.611 ; 71.122,62.611 ccw(c71.122,61.72) 70.492,62.35 cw(c71.122,61.72) 71.122,62.611 ; 71.735,62.611 cw(c71.735,64.115) 70.672,63.052 ccw(c71.735,64.115) 71.735,62.611 ; 71.735,62.611 ccw(c71.735,61.107) 70.672,62.17 cw(c71.735,61.107) 71.735,62.611 ; 73.332,62.426 cw(c72.518,61.612) 73.662,61.489 ccw(c72.518,61.612) 73.332,62.426 ; 73.698,62.06 ccw(c73.915,62.276) 73.915,61.97 cw(c73.915,62.276) 73.698,62.06
NetTLP521-1_3: 1-1.3 U1.5 | length 19.5
  Top Layer w0.254: 1-1.3 85.745,76.702 U1.5 ; 83.523,76.702 cw(c83.523,77.928) 82.656,77.061 ccw(c83.523,77.928) 83.523,76.702 ; 83.523,76.702 ccw(c83.523,75.475) 82.656,76.343 cw(c83.523,75.475) 83.523,76.702 ; 87.125,75.322 cw(c85.976,74.173) 87.601,74.173 ccw(c85.976,74.173) 87.125,75.322 ; 87.125,75.322 ccw(c88.274,76.47) 88.274,74.846 cw(c88.274,76.47) 87.125,75.322 ; 87.559,74.888 cw(c86.843,74.173) 87.855,74.173 ccw(c86.843,74.173) 87.559,74.888 ; 87.559,74.888 ccw(c88.274,75.603) 88.274,74.592 cw(c88.274,75.603) 87.559,74.888
NetTLP521-2_3: 1-2.3 U1.7 | length 18.5
  Top Layer w0.254: 1-2.3 88.263,71.622 U1.7 ; 83.523,71.622 cw(c83.523,72.848) 82.656,71.981 ccw(c83.523,72.848) 83.523,71.622 ; 83.523,71.622 ccw(c83.523,70.395) 82.656,71.263 cw(c83.523,70.395) 83.523,71.622 ; 86.623,71.622 ccw(c86.623,73.283) 87.798,72.109 cw(c86.623,73.283) 86.623,71.622 ; 86.675,71.622 cw(c86.675,70.034) 87.798,71.157 ccw(c86.675,70.034) 86.675,71.622 ; 87.236,71.622 ccw(c87.236,72.67) 87.978,71.929 cw(c87.236,72.67) 87.236,71.622 ; 87.288,71.622 cw(c87.288,70.647) 87.978,71.336 ccw(c87.288,70.647) 87.288,71.622
NetTLP521-3_3: 1-3.3 U1.10 | length 24.1
  Top Layer w0.254: 1-3.3 85.846,66.542 87.127,67.823 U1.10 ; 83.523,66.542 cw(c83.523,67.768) 82.656,66.901 ccw(c83.523,67.768) 83.523,66.542 ; 83.523,66.542 ccw(c83.523,65.315) 82.656,66.183 cw(c83.523,65.315) 83.523,66.542 ; 91.729,67.823 cw(c91.729,66.198) 92.878,67.347 ccw(c91.729,66.198) 91.729,67.823 ; 91.729,67.823 ccw(c91.729,69.447) 92.878,68.299 cw(c91.729,69.447) 91.729,67.823 ; 92.342,67.823 cw(c92.342,66.811) 93.058,67.526 ccw(c92.342,66.811) 92.342,67.823 ; 92.342,67.823 ccw(c92.342,68.834) 93.058,68.119 cw(c92.342,68.834) 92.342,67.823
NetTLP521-4_3: 1-4.3 U1.12 | length 25.2
  Top Layer w0.254: 1-4.3 85.973,61.462 87.249,62.738 90.809,62.738 U1.12 ; 83.523,61.462 cw(c83.523,62.688) 82.656,61.821 ccw(c83.523,62.688) 83.523,61.462 ; 83.523,61.462 ccw(c83.523,60.235) 82.656,61.103 cw(c83.523,60.235) 83.523,61.462 ; 92.205,64.134 cw(c93.354,62.985) 93.354,64.61 ccw(c93.354,62.985) 92.205,64.134 ; 92.205,64.134 ccw(c91.056,65.283) 92.681,65.283 cw(c91.056,65.283) 92.205,64.134 ; 92.639,64.567 cw(c93.354,63.852) 93.354,64.864 ccw(c93.354,63.852) 92.639,64.567 ; 92.639,64.567 ccw(c91.923,65.283) 92.935,65.283 cw(c91.923,65.283) 92.639,64.567
PWM-A: JP1.1 U1.6 | length 60.7
  Top Layer w0.254: JP1.1 63.627,59.69 ; U1.6 94.539,71.718 94.539,59.487 93.904,58.852 65.532,58.801 64.516,58.801 63.627,59.69 ; 63.109,59.69 cw(c63.109,60.272) 62.649,59.916 ccw(c63.109,60.272) 63.109,59.69 ; 63.109,59.69 ccw(c63.109,59.108) 62.649,59.464 cw(c63.109,59.108) 63.109,59.69 ; 63.627,59.69 cw(c63.627,60.673) 62.85,60.071 ccw(c63.627,60.673) 63.627,59.69 ; 63.627,59.69 ccw(c63.627,58.707) 62.85,59.309 cw(c63.627,58.707) 63.627,59.69 ; 94.069,72.187 cw(c94.785,72.903) 93.773,72.903 ccw(c94.785,72.903) 94.069,72.187 ; 94.069,72.187 ccw(c93.354,71.472) 93.354,72.484 cw(c93.354,71.472) 94.069,72.187 ; 94.503,71.754 cw(c95.652,72.903) 94.027,72.903 ccw(c95.652,72.903) 94.503,71.754 ; 94.503,71.754 ccw(c93.354,70.605) 93.354,72.23 cw(c93.354,70.605) 94.503,71.754
PWM-B: JP1.3 U1.11 | length 50.1
  Bottom Layer w0.254: JP1.3 68.174,70.587 82.804,70.587 83.718,71.501 86.716,71.501 87.935,70.282 88.9,70.282 89.455,69.727 89.455,67.734 U1.11 ; 62.987,65.4 cw(c62.357,66.03) 62.357,65.139 ccw(c62.357,66.03) 62.987,65.4 ; 62.987,65.4 ccw(c63.617,64.77) 62.726,64.77 cw(c63.617,64.77) 62.987,65.4 ; 63.421,65.834 cw(c62.357,66.897) 62.357,65.393 ccw(c62.357,66.897) 63.421,65.834 ; 63.421,65.834 ccw(c64.484,64.77) 62.98,64.77 cw(c64.484,64.77) 63.421,65.834 ; 88.989,67.268 cw(c88.274,67.983) 88.274,66.972 ccw(c88.274,67.983) 88.989,67.268 ; 88.989,67.268 ccw(c89.705,66.553) 88.693,66.553 cw(c89.705,66.553) 88.989,67.268 ; 89.423,67.702 cw(c88.274,68.85) 88.274,67.226 ccw(c88.274,68.85) 89.423,67.702 ; 89.423,67.702 ccw(c90.572,66.553) 88.947,66.553 cw(c90.572,66.553) 89.423,67.702
TLP00: 1-2.1 R-2.3 | length 22.8
  Top Layer w0.254: 1-2.1 78.48,74.162 79.756,75.438 R-2.3 ; 75.903,74.162 cw(c75.903,75.388) 75.036,74.521 ccw(c75.903,75.388) 75.903,74.162 ; 75.903,74.162 ccw(c75.903,72.935) 75.036,73.803 cw(c75.903,72.935) 75.903,74.162 ; 83.713,75.438 cw(c83.713,73.934) 84.776,74.997 ccw(c83.713,73.934) 83.713,75.438 ; 83.713,75.438 ccw(c83.713,76.942) 84.776,75.879 cw(c83.713,76.942) 83.713,75.438 ; 84.326,75.438 cw(c84.326,74.547) 84.956,75.177 ccw(c84.326,74.547) 84.326,75.438 ; 84.326,75.438 ccw(c84.326,76.329) 84.956,75.699 cw(c84.326,76.329) 84.326,75.438
TLP01: 1-1.1 R-2.2 | length 22.8
  Top Layer w0.254: 1-1.1 77.095,79.242 78.359,77.978 R-2.2 ; 75.903,79.242 cw(c75.903,80.468) 75.036,79.601 ccw(c75.903,80.468) 75.903,79.242 ; 75.903,79.242 ccw(c75.903,78.015) 75.036,78.883 cw(c75.903,78.015) 75.903,79.242 ; 83.713,77.978 cw(c83.713,76.474) 84.776,77.537 ccw(c83.713,76.474) 83.713,77.978 ; 83.713,77.978 ccw(c83.713,79.482) 84.776,78.419 cw(c83.713,79.482) 83.713,77.978 ; 84.326,77.978 cw(c84.326,77.087) 84.956,77.717 ccw(c84.326,77.087) 84.326,77.978 ; 84.326,77.978 ccw(c84.326,78.869) 84.956,78.239 cw(c84.326,78.869) 84.326,77.978
TLP02: 1-3.1 R-2.6 | length 22.8
  Top Layer w0.254: 1-3.1 77.222,69.082 78.486,67.818 R-2.6 ; 75.903,69.082 cw(c75.903,70.308) 75.036,69.441 ccw(c75.903,70.308) 75.903,69.082 ; 75.903,69.082 ccw(c75.903,67.855) 75.036,68.723 cw(c75.903,67.855) 75.903,69.082 ; 83.713,67.818 cw(c83.713,66.314) 84.776,67.377 ccw(c83.713,66.314) 83.713,67.818 ; 83.713,67.818 ccw(c83.713,69.322) 84.776,68.259 cw(c83.713,69.322) 83.713,67.818 ; 84.326,67.818 cw(c84.326,66.927) 84.956,67.557 ccw(c84.326,66.927) 84.326,67.818 ; 84.326,67.818 ccw(c84.326,68.709) 84.956,68.079 cw(c84.326,68.709) 84.326,67.818
TLP03: 1-4.1 R-2.7 | length 22.8
  Top Layer w0.254: 1-4.1 78.988,64.002 80.264,65.278 R-2.7 ; 75.903,64.002 cw(c75.903,65.228) 75.036,64.361 ccw(c75.903,65.228) 75.903,64.002 ; 75.903,64.002 ccw(c75.903,62.775) 75.036,63.643 cw(c75.903,62.775) 75.903,64.002 ; 83.713,65.278 cw(c83.713,63.774) 84.776,64.837 ccw(c83.713,63.774) 83.713,65.278 ; 83.713,65.278 ccw(c83.713,66.782) 84.776,65.719 cw(c83.713,66.782) 83.713,65.278 ; 84.326,65.278 cw(c84.326,64.387) 84.956,65.017 ccw(c84.326,64.387) 84.326,65.278 ; 84.326,65.278 ccw(c84.326,66.169) 84.956,65.539 cw(c84.326,66.169) 84.326,65.278
TLP04: 1-1.4 R-2.1 | length 15.2
  Top Layer w0.254: 1-1.4 83.941,79.242 R-2.1 ; 83.523,79.242 cw(c83.523,80.468) 82.656,79.601 ccw(c83.523,80.468) 83.523,79.242 ; 83.523,79.242 ccw(c83.523,78.015) 82.656,78.883 cw(c83.523,78.015) 83.523,79.242 ; 84.153,79.454 cw(c85.217,78.391) 85.217,79.895 ccw(c85.217,78.391) 84.153,79.454 ; 84.153,79.454 ccw(c83.09,80.518) 84.594,80.518 cw(c83.09,80.518) 84.153,79.454 ; 84.587,79.888 cw(c85.217,79.258) 85.217,80.149 ccw(c85.217,79.258) 84.587,79.888 ; 84.587,79.888 ccw(c83.957,80.518) 84.848,80.518 cw(c83.957,80.518) 84.587,79.888
TLP05: 1-2.4 R-2.4 | length 15.2
  Top Layer w0.254: 1-2.4 83.953,74.162 R-2.4 ; 83.523,74.162 cw(c83.523,75.388) 82.656,74.521 ccw(c83.523,75.388) 83.523,74.162 ; 83.523,74.162 ccw(c83.523,72.935) 82.656,73.803 cw(c83.523,72.935) 83.523,74.162 ; 84.153,73.962 cw(c83.09,72.898) 84.594,72.898 ccw(c83.09,72.898) 84.153,73.962 ; 84.153,73.962 ccw(c85.217,75.025) 85.217,73.521 cw(c85.217,75.025) 84.153,73.962 ; 84.587,73.528 cw(c83.957,72.898) 84.848,72.898 ccw(c83.957,72.898) 84.587,73.528 ; 84.587,73.528 ccw(c85.217,74.158) 85.217,73.267 cw(c85.217,74.158) 84.587,73.528
TLP06: 1-3.4 R-2.5 | length 15.2
  Top Layer w0.254: 1-3.4 83.941,69.082 R-2.5 ; 83.523,69.082 cw(c83.523,70.308) 82.656,69.441 ccw(c83.523,70.308) 83.523,69.082 ; 83.523,69.082 ccw(c83.523,67.855) 82.656,68.723 cw(c83.523,67.855) 83.523,69.082 ; 84.153,69.294 cw(c85.217,68.231) 85.217,69.735 ccw(c85.217,68.231) 84.153,69.294 ; 84.153,69.294 ccw(c83.09,70.358) 84.594,70.358 cw(c83.09,70.358) 84.153,69.294 ; 84.587,69.728 cw(c85.217,69.098) 85.217,69.989 ccw(c85.217,69.098) 84.587,69.728 ; 84.587,69.728 ccw(c83.957,70.358) 84.848,70.358 cw(c83.957,70.358) 84.587,69.728
TLP07: 1-4.4 R-2.8 | length 11.5
  Top Layer w0.254: 1-4.4 81.916,63.753 82.931,62.738 R-2.8 ; 83.713,62.738 cw(c83.713,61.234) 84.776,62.297 ccw(c83.713,61.234) 83.713,62.738 ; 83.713,62.738 ccw(c83.713,64.242) 84.776,63.179 cw(c83.713,64.242) 83.713,62.738 ; 84.326,62.738 cw(c84.326,61.847) 84.956,62.477 ccw(c84.326,61.847) 84.326,62.738 ; 84.326,62.738 ccw(c84.326,63.629) 84.956,62.999 cw(c84.326,63.629) 84.326,62.738

## Polygon pours and split planes (outlines as drawn)
no net on Top Layer (hatched 45Degree grid 0.508 track 0.203): 58.674,91.567 58.674,50.419 134.112,50.419 134.112,91.441 58.801,91.441

## Keep-outs
Keep-Out Layer:
  lines w0.254: 58.293,49.911 58.42,91.948 134.747,91.948 ; 58.42,49.911 134.62,49.911 134.62,92.329

## Silkscreen, mask and mechanical layers (free items; w line width, h text height)
Top Overlay:
  drawing of 860 lines, arcs and shapes, not listed
  text "SN:090417" at 114.856,88.274 h1.52
  text "5V" at 59.436,84.201 h1.02 r270
  text "GND" at 131.445,81.788 h1.22 r90
  text "GND" at 59.436,81.534 h1.02 r270
  text "IN1---IN4" at 59.436,77.724 h1.02 r270
  text "*" at 71.755,77.216 h1.52
  text "A" at 131.191,73.152 h1.52 r90
  text "*" at 71.882,72.009 h1.52
  text "5V" at 59.309,68.199 h1.02 r270
  text "B" at 131.318,67.31 h1.52 r90
  text "*" at 71.882,67.056 h1.52
  text "B" at 59.309,65.151 h1.02 r270
  text "A'" at 131.318,63.246 h1.52 r90
  text "5V" at 59.309,63.119 h1.02 r270
  text "*" at 71.755,61.722 h1.52
  text "A" at 59.309,59.944 h1.02 r270
  text "*" at 84.709,57.404 h1.52
  text "B'" at 131.191,56.515 h1.52 r90
  text "http://www.ourhc.cn" at 121.864,56.487 h1.76 r90

## Text inside footprints (layer, text, board x,y; h text height)
C1: Top Overlay "+" at 70.751,89.065 h1.5 r270
C2: Top Overlay "+" at 78.174,81.42 h1.15 r90
C3: Top Overlay "+" at 72.759,52.159 h1.5 r90
C4: Top Overlay "+" at 77.02,59.296 h1.15 r270
U1: Top Overlay "15" at 87.565,60.279 h1.5 r270; Top Overlay "1" at 87.736,81.742 h1.5 r270